# Altium PCB PCB1.PcbDoc
Units mm, origin at the board's own origin, x right, y up, seen from the top; angles counter-clockwise.
Board outline 144.53 x 25.27 mm, 2 copper layers (Top Layer, Bottom Layer), stack 1.571 mm thick; 104 components, 78 nets, 265 pads, 76 vias.
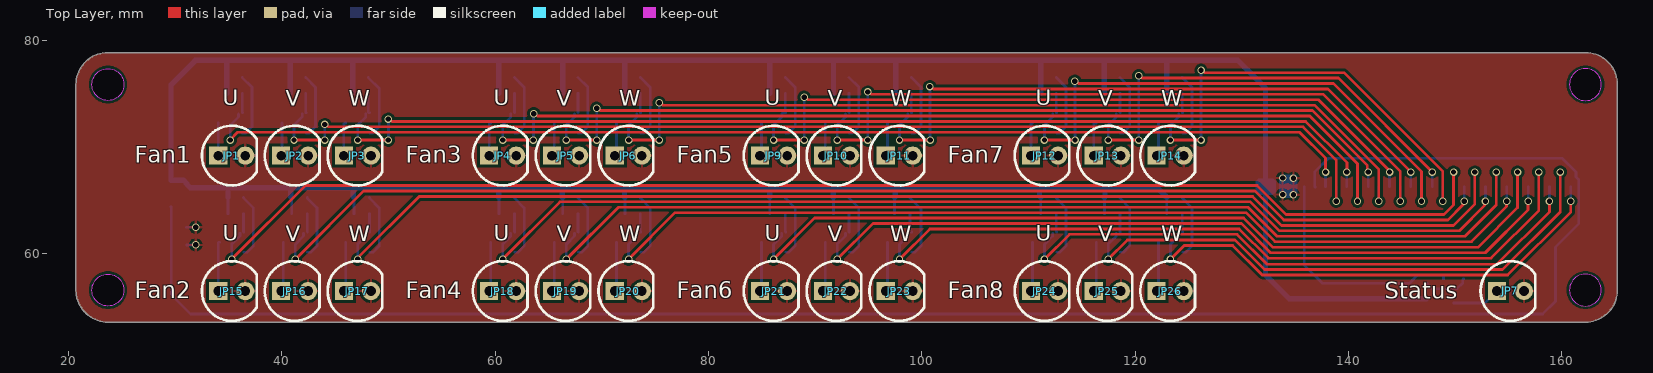
[diagram p0: Top Layer view]
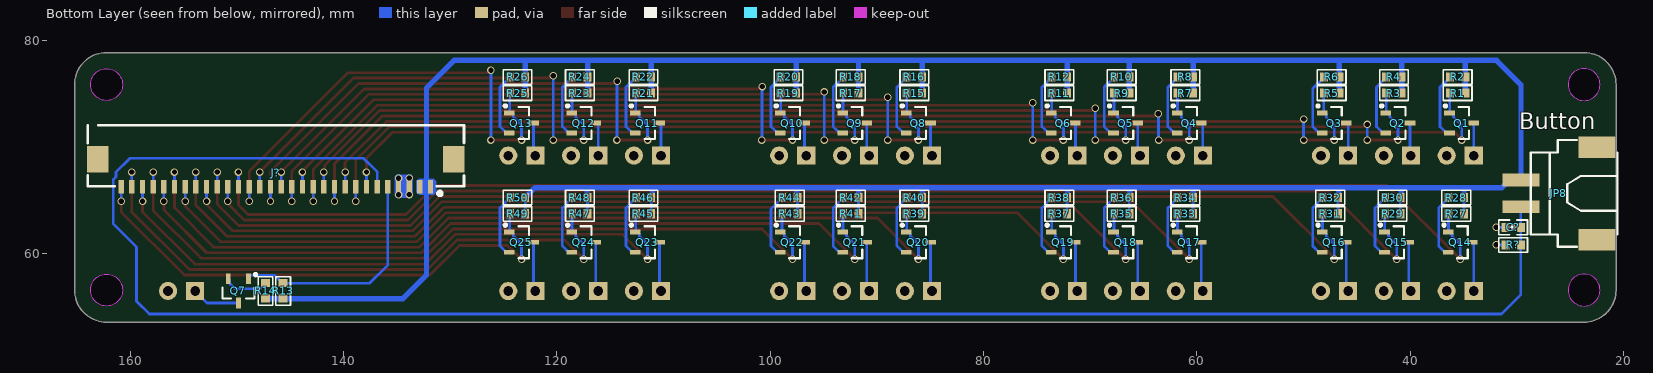
[diagram p1: Bottom Layer view, seen from below]
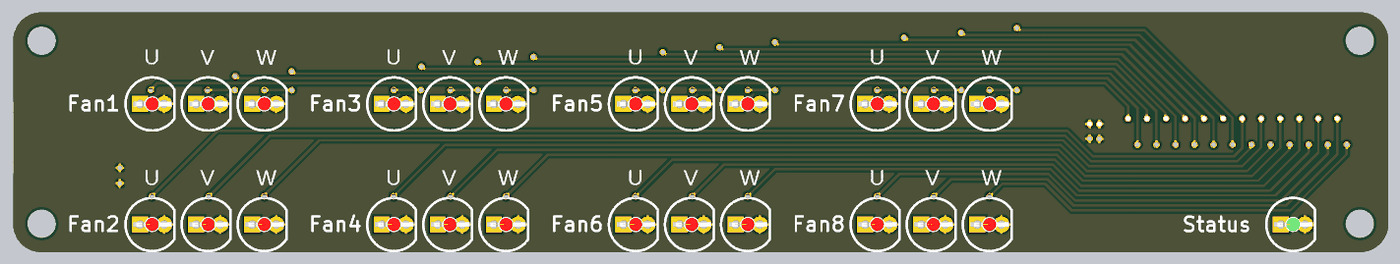
[diagram p2: 3D render of the assembled board from above, using the file's embedded part models]
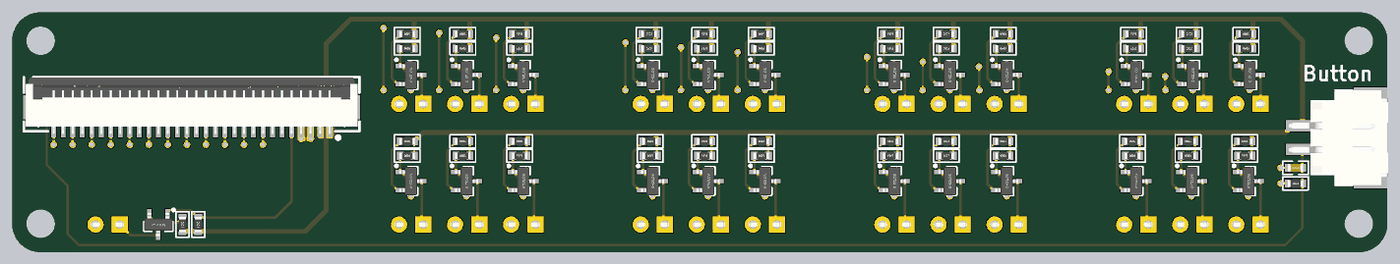
[diagram p3: 3D render of the assembled board from below, using the file's embedded part models]

## Layer stack, top to bottom
Top Solder: solder mask 0.0102, Solder Resist, Dk 3.5
Top Layer: signal copper 0.0356
Dielectric 1: dielectric 1.5, FR-4, Dk 4.8
Bottom Layer: signal copper 0.0356
Bottom Solder: solder mask 0.0102, Solder Resist, Dk 3.5

## Board outline
23.701,53.594 cw(c23.701,56.594) 20.701,56.594 20.701,75.867 cw(c23.701,75.867) 23.701,78.867 162.227,78.867 cw(c162.227,75.867) 165.227,75.867 165.227,56.594 cw(c162.227,56.594) 162.227,53.594
cut-out: 23.701,55.094 cw(c23.701,56.594) 22.201,56.594 cw(c23.701,56.594) 23.701,58.094 cw(c23.701,56.594) 25.201,56.594 cw(c23.701,56.594)
cut-out: 23.701,74.367 cw(c23.701,75.867) 22.201,75.867 cw(c23.701,75.867) 23.701,77.367 cw(c23.701,75.867) 25.201,75.867 cw(c23.701,75.867)
cut-out: 160.727,75.867 ccw(c162.227,75.867) 162.227,74.367 ccw(c162.227,75.867) 163.727,75.867 ccw(c162.227,75.867) 162.227,77.367 ccw(c162.227,75.867)
cut-out: 160.727,56.594 ccw(c162.227,56.594) 162.227,55.094 ccw(c162.227,56.594) 163.727,56.594 ccw(c162.227,56.594) 162.227,58.094 ccw(c162.227,56.594)

## Design rules (kind name [scope] priority, off if disabled: settings)
Clearance [All] p1: gap=0.254 ignorepadtopadclearanceinfootprint=FALSE except(0: Arc-Hole Track-Hole SMDPad-Hole THPad-Hole Via-Hole Fill-Hole Poly-Hole Region-Hole Text-Hole)
PolygonConnect [All] p1: connectstyle=Relief reliefconductorwidth=0.254 reliefentries=4 polygonreliefangle="90 Angle" airgapwidth=0.254
RoutingVias [All] p1: holewidth=0.711 width=1.27 viastyle="Through Hole" minholewidth=0.3 minwidth=0.4 maxholewidth=0.5 maxwidth=0.7
SolderMaskExpansion [All] p1: expansion=0.102 istentingtop=FALSE
Width [All] p1: maxlimit=2.54 minlimit=0.254 preferedwidth=0.254
30 further rules are at their usual default settings.

## Components (designator, comment, footprint, x,y, rotation, side; value= is the part's Value field where it differs from the comment)
C? "100nF/25V" C0603_L 30.353,62.484 r0 bottom
J? "Header 30X1" FPC1.0-2H-WS-30P 146.359,68.829 r0 bottom
JP1 "HDR-1X2" "LED 5MM-R" 35.312,69.209 r0 top
JP2 "HDR-1X2" "LED 5MM-R" 41.204,69.209 r0 top
JP3 "HDR-1X2" "LED 5MM-R" 47.095,69.209 r0 top
JP4 "HDR-1X2" "LED 5MM-R" 60.712,69.209 r0 top
JP5 "HDR-1X2" "LED 5MM-R" 66.604,69.209 r0 top
JP6 "HDR-1X2" "LED 5MM-R" 72.495,69.209 r0 top
JP7 "HDR-1X2" "LED 5MM-G" 155.194,56.515 r0 top
JP8 "HDR-1X2" XH2.54-WS-2P 24.638,65.659 r90 bottom
JP9 "HDR-1X2" "LED 5MM-R" 86.112,69.209 r0 top
JP10 "HDR-1X2" "LED 5MM-R" 92.004,69.209 r0 top
JP11 "HDR-1X2" "LED 5MM-R" 97.895,69.209 r0 top
JP12 "HDR-1X2" "LED 5MM-R" 111.512,69.209 r0 top
JP13 "HDR-1X2" "LED 5MM-R" 117.404,69.209 r0 top locked
JP14 "HDR-1X2" "LED 5MM-R" 123.295,69.209 r0 top
JP15 "HDR-1X2" "LED 5MM-R" 35.312,56.509 r0 top
JP16 "HDR-1X2" "LED 5MM-R" 41.204,56.509 r0 top
JP17 "HDR-1X2" "LED 5MM-R" 47.095,56.509 r0 top
JP18 "HDR-1X2" "LED 5MM-R" 60.712,56.509 r0 top
JP19 "HDR-1X2" "LED 5MM-R" 66.604,56.509 r0 top
JP20 "HDR-1X2" "LED 5MM-R" 72.495,56.509 r0 top
JP21 "HDR-1X2" "LED 5MM-R" 86.112,56.509 r0 top
JP22 "HDR-1X2" "LED 5MM-R" 92.004,56.509 r0 top
JP23 "HDR-1X2" "LED 5MM-R" 97.895,56.509 r0 top
JP24 "HDR-1X2" "LED 5MM-R" 111.512,56.509 r0 top
JP25 "HDR-1X2" "LED 5MM-R" 117.404,56.509 r0 top
JP26 "HDR-1X2" "LED 5MM-R" 123.295,56.509 r0 top
Q1 "AO3401" SOT23-3L 35.179,72.263 r270 bottom
Q2 "AO3401" SOT23-3L 41.148,72.263 r270 bottom
Q3 "AO3401" SOT23-3L 47.117,72.263 r270 bottom
Q4 "AO3401" SOT23-3L 60.706,72.263 r270 bottom
Q5 "AO3401" SOT23-3L 66.675,72.263 r270 bottom
Q6 "AO3401" SOT23-3L 72.517,72.263 r270 bottom
Q7 "AO3401" SOT23-3L 149.86,56.515 r0 bottom
Q8 "AO3401" SOT23-3L 86.106,72.263 r270 bottom
Q9 "AO3401" SOT23-3L 92.075,72.263 r270 bottom
Q10 "AO3401" SOT23-3L 97.917,72.263 r270 bottom
Q11 "AO3401" SOT23-3L 111.506,72.263 r270 bottom
Q12 "AO3401" SOT23-3L 117.475,72.263 r270 bottom
Q13 "AO3401" SOT23-3L 123.317,72.263 r270 bottom
Q14 "AO3401" SOT23-3L 35.306,61.087 r270 bottom
Q15 "AO3401" SOT23-3L 41.275,61.087 r270 bottom
Q16 "AO3401" SOT23-3L 47.117,61.087 r270 bottom
Q17 "AO3401" SOT23-3L 60.706,61.087 r270 bottom
Q18 "AO3401" SOT23-3L 66.675,61.087 r270 bottom
Q19 "AO3401" SOT23-3L 72.517,61.087 r270 bottom
Q20 "AO3401" SOT23-3L 86.106,61.087 r270 bottom
Q21 "AO3401" SOT23-3L 92.075,61.087 r270 bottom
Q22 "AO3401" SOT23-3L 97.917,61.087 r270 bottom
Q23 "AO3401" SOT23-3L 111.506,61.087 r270 bottom
Q24 "AO3401" SOT23-3L 117.475,61.087 r270 bottom
Q25 "AO3401" SOT23-3L 123.317,61.087 r270 bottom
R1 "10K 1%" R0603_L 35.56,75.057 r180 bottom
R2 "0R 1%" R0603_L 35.56,76.581 r180 bottom
R3 "10K 1%" R0603_L 41.529,75.057 r180 bottom
R4 "0R 1%" R0603_L 41.529,76.581 r180 bottom
R5 "10K 1%" R0603_L 47.371,75.057 r180 bottom
R6 "0R 1%" R0603_L 47.371,76.581 r180 bottom
R7 "10K 1%" R0603_L 61.087,75.057 r180 bottom
R8 "0R 1%" R0603_L 61.087,76.581 r180 bottom
R9 "10K 1%" R0603_L 67.056,75.057 r180 bottom
R10 "0R 1%" R0603_L 67.056,76.581 r180 bottom
R11 "10K 1%" R0603_L 72.898,75.057 r180 bottom
R12 "0R 1%" R0603_L 72.898,76.581 r180 bottom
R13 "10K 1%" R0603_L 145.669,56.515 r270 bottom
R14 "0R 1%" R0603_L 147.32,56.515 r270 bottom
R15 "10K 1%" R0603_L 86.487,75.057 r180 bottom
R16 "0R 1%" R0603_L 86.487,76.581 r180 bottom
R17 "10K 1%" R0603_L 92.456,75.057 r180 bottom
R18 "0R 1%" R0603_L 92.456,76.581 r180 bottom
R19 "10K 1%" R0603_L 98.298,75.057 r180 bottom
R20 "0R 1%" R0603_L 98.298,76.581 r180 bottom
R21 "10K 1%" R0603_L 111.887,75.057 r180 bottom
R22 "0R 1%" R0603_L 111.887,76.581 r180 bottom
R23 "10K 1%" R0603_L 117.856,75.057 r180 bottom
R24 "0R 1%" R0603_L 117.856,76.581 r180 bottom
R25 "10K 1%" R0603_L 123.698,75.057 r180 bottom
R26 "0R 1%" R0603_L 123.698,76.581 r180 bottom
R27 "10K 1%" R0603_L 35.687,63.754 r180 bottom
R28 "0R 1%" R0603_L 35.687,65.278 r180 bottom
R29 "10K 1%" R0603_L 41.656,63.754 r180 bottom
R30 "0R 1%" R0603_L 41.656,65.278 r180 bottom
R31 "10K 1%" R0603_L 47.498,63.754 r180 bottom
R32 "0R 1%" R0603_L 47.498,65.278 r180 bottom
R33 "10K 1%" R0603_L 61.087,63.754 r180 bottom
R34 "0R 1%" R0603_L 61.087,65.278 r180 bottom
R35 "10K 1%" R0603_L 67.056,63.754 r180 bottom
R36 "0R 1%" R0603_L 67.056,65.278 r180 bottom
R37 "10K 1%" R0603_L 72.898,63.754 r180 bottom
R38 "0R 1%" R0603_L 72.898,65.278 r180 bottom
R39 "10K 1%" R0603_L 86.487,63.754 r180 bottom
R40 "0R 1%" R0603_L 86.487,65.278 r180 bottom
R41 "10K 1%" R0603_L 92.456,63.754 r180 bottom
R42 "0R 1%" R0603_L 92.456,65.278 r180 bottom
R43 "10K 1%" R0603_L 98.171,63.754 r180 bottom
R44 "0R 1%" R0603_L 98.171,65.278 r180 bottom
R45 "10K 1%" R0603_L 111.887,63.754 r180 bottom
R46 "0R 1%" R0603_L 111.887,65.278 r180 bottom
R47 "10K 1%" R0603_L 117.856,63.754 r180 bottom
R48 "0R 1%" R0603_L 117.856,65.278 r180 bottom
R49 "10K 1%" R0603_L 123.698,63.754 r180 bottom
R50 "0R 1%" R0603_L 123.698,65.278 r180 bottom
R? "10K 1%" R0603_L 30.353,60.833 r180 bottom

## Footprints (in the part's own frame and the unit in brackets; to place one, negate y for a bottom-side part, rotate by r counter-clockwise, add the part's x,y. Pads: shape width x height; smd on the part's side, far side on the other; paste and mask are expansions set on the pad)
C0603_L [mm] "贴片MLCC电容"
  rect 0.75x0.85 smd: 1(-0.725,0) 2(0.725,0)
  silkscreen extent -1.35,-0.69 1.35,0.69, body extent -0.8,-0.4 0.8,0.4, height 0.8
FPC1.0-2H-WS-30P [mm] "翻盖FPC，脚距1mm，不含脚（长34.9mm，宽5.2mm，高1.96mm）"
  rect 2x2.5 smd: 0(-16.69,-0.04) 0(16.69,-0.04)
  rect 0.5x1.25 smd: 1(-14.5,2.535) 2(-13.5,2.535) 3(-12.5,2.535) 4(-11.5,2.535) 5(-10.5,2.535) 6(-9.5,2.535) 7(-8.5,2.535) 8(-7.5,2.535) 9(-6.5,2.535) 10(-5.5,2.535) 11(-4.5,2.535) 12(-3.5,2.535) 13(-2.5,2.535) 14(-1.5,2.535) 15(-0.5,2.535) 16(0.5,2.535) 17(1.5,2.535) 18(2.5,2.535) 19(3.5,2.535) 20(4.5,2.535) 21(5.5,2.535) 22(6.5,2.535) 23(7.5,2.535) 24(8.5,2.535) 25(9.5,2.535) 26(10.5,2.535) 27(11.5,2.535) 28(12.5,2.535) 29(13.5,2.535) 30(14.5,2.535)
  silkscreen extent -17.64,-3.21 17.63,3.27, body extent -17.45,-3.19 17.45,2.81, height 2
"LED 5MM-G" [mm] "绿色5mm直插LED"
  rect 1.7x1.7 hole 0.9: 1(-1.27,0)
  round 1.7 hole 0.9: 2(1.27,0)
  silkscreen extent -2.8,-2.8 2.33,2.8, body extent -2.85,-2.85 2.45,2.85, height 8.75
"LED 5MM-R" [mm] "红色5mm直插LED"
  rect 1.7x1.7 hole 0.9: 1(-1.27,0)
  round 1.7 hole 0.9: 2(1.27,0)
  silkscreen extent -2.8,-2.8 2.33,2.8, body extent -2.85,-2.85 2.45,2.85, height 8.75
R0603_L [mm] "1/10W贴片电阻"
  rect 0.75x0.85 smd: 1(-0.725,0) 2(0.725,0)
  silkscreen extent -1.35,-0.69 1.35,0.69, body extent -0.8,-0.4 0.8,0.4, height 0.4
SOT23-3L [mm] "3x1.3x1mm(长宽高)"
  rect 0.45x1 smd: 1(-0.95,-1.143) 2(0.95,-1.143) 3(0,1.125)
  silkscreen extent -1.72,-1.65 1.5,0.7, body extent -1.5,-1.2 1.5,1.2, height 1.05
XH2.54-WS-2P [mm] "长：10mm，宽：8mm，高：6.1mm"
  rect 2x3.5 smd: 0(-4.327,-2.15) 0(4.327,-2.15)
  rect 1.2x3.5 smd: 1(-1.25,4.981) 2(1.25,4.981)
  silkscreen extent -5,-4.06 5,4.06, body extent -5,-4 5,6.42, height 6.05

## Part data
C?: library part C, "无极性贴片电容", BOM名称=无极性贴片电容, 学习资源=www.ooocke.com, 材质=X7R, 版权归属=源创客
JP1 JP2 JP3 JP4 JP5 JP6 JP7 JP8 JP9 JP10 JP11 JP12 JP13 JP14 JP15 JP16 JP17 JP18 JP19 JP20 JP21 JP22 JP23 JP24 JP25 JP26: library part "Header 2", "2P接插件", BOM名称=2P接插件, 学习资源=www.ooocke.com, 版权归属=源创客
Q1 Q2 Q3 Q4 Q5 Q6 Q7 Q8 Q9 Q10 Q11 Q12 Q13 Q14 Q15 Q16 Q17 Q18 Q19 Q20 Q21 Q22 Q23 Q24 Q25: "P沟道 30V/4.2A", BOM名称=场效应管, 学习资源=www.ooocke.com, 描述="P沟道 30V/4.2A", 版权归属=源创客
R1 R2 R3 R4 R5 R6 R7 R8 R9 R10 R11 R12 R13 R14 R15 R16 R17 R18 R19 R20 R21 R22 R23 R24 R25 R26 R27 R28 R29 R30 R31 R32 R33 R34 R35 R36 R37 R38 R39 R40 R41 R42 R43 R44 R45 R46 R47 R48 R49 R50 R?: library part R, "贴片电阻", BOM名称=贴片电阻, 学习资源=www.ooocke.com, 版权归属=源创客

## Via types
v1: diameter 0.7, hole 0.5, Top Layer to Bottom Layer, 76 vias

## Nets (pads, with @x,y where several pads share a name; then routed paths per layer and width w, separated by ;. In a path a pad name is that pad's centre, name@x,y a point inside that pad or via, vN(x,y) a via of type N, cw(c..) or ccw(c..) an arc to the next point about the centre after c; other vN are vias at no path point)
Button: C?.1 J?.6 JP8.1 R?.2 | length 179.4
  Bottom Layer w0.254: JP8.1 29.628,64.4 C?.1 R?.2 29.628,56.173 31.445,54.356 158.217,54.356 159.41,55.55 159.41,60.63 161.586,62.806 161.586,66.981 161.341,67.226 161.341,67.666 160.045,68.961 138.124,68.961 136.859,67.696 J?.6 J?.6@136.9,66.253
GND: C?.2 J?.3 J?.4 JP1.2 JP2.2 JP3.2 JP4.2 JP5.2 JP6.2 JP7.2 JP9.2 JP10.2 JP11.2 JP12.2 JP13.2 JP14.2 JP15.2 JP16.2 JP17.2 JP18.2 JP19.2 JP20.2 JP21.2 JP22.2 JP23.2 JP24.2 JP25.2 JP26.2 R?.1 | length 2.2
  Bottom Layer w0.254: R?.1 v1(31.926,60.833) ; C?.2 v1(31.926,62.484) ; 134.493,66.497 J?.4@134.874,66.878
  other v1: 134.849,65.532 133.833,65.557 134.849,67.081 133.833,67.107
NetJP1_1: JP1.1 Q1.3 | length 3.1
  Bottom Layer w0.254: JP1.1@34.054,69.221 JP1.1 34.042,72.251 Q1.3
NetJP2_1: JP2.1 Q2.3 | length 3.1
  Bottom Layer w0.254: JP2.1 40.023,69.298 Q2.3
NetJP3_1: JP3.1 Q3.3 | length 3.4
  Bottom Layer w0.254: JP3.1@45.992,69.376 JP3.1 45.825,72.165 45.923,72.263 Q3.3
NetJP4_1: JP4.1 Q4.3 | length 3.3
  Bottom Layer w0.254: JP4.1@59.581,69.348 JP4.1 59.442,72.165 59.54,72.263 Q4.3
NetJP5_1: JP5.1 Q5.3 | length 3.1
  Bottom Layer w0.254: JP5.1 65.55,69.425 Q5.3
NetJP6_1: JP6.1 Q6.3 | length 3.1
  Bottom Layer w0.254: JP6.1 71.392,69.376 Q6.3
NetJP7_1: JP7.1 Q7.3 | length 4.5
  Bottom Layer w0.254: Q7.3 152.799,55.39 JP7.1
NetJP9_1: JP9.1 Q8.3 | length 3.1
  Bottom Layer w0.254: JP9.1 84.981,69.348 Q8.3
NetJP10_1: JP10.1 Q9.3 | length 3.1
  Bottom Layer w0.254: JP10.1 90.95,69.425 Q9.3
NetJP11_1: JP11.1 Q10.3 | length 3.1
  Bottom Layer w0.254: JP11.1 96.792,69.376 Q10.3
NetJP12_1: JP12.1 Q11.3 | length 3.3
  Bottom Layer w0.254: JP12.1@110.381,69.348 JP12.1 110.242,72.165 110.34,72.263 Q11.3
NetJP13_1: JP13.1 Q12.3 | length 3.5
  Bottom Layer w0.254: JP13.1@116.35,69.425 JP13.1 116.134,72.165 116.232,72.263 Q12.3
NetJP14_1: JP14.1 Q13.3 | length 3.1
  Bottom Layer w0.254: JP14.1 122.192,69.376 Q13.3
NetJP15_1: JP15.1 Q14.3 | length 4.7
  Bottom Layer w0.254: JP15.1 34.042,60.989 34.14,61.087 Q14.3
NetJP16_1: JP16.1 Q15.3 | length 4.7
  Bottom Layer w0.254: JP16.1 40.15,56.725 Q15.3
NetJP17_1: JP17.1 Q16.3 | length 4.6
  Bottom Layer w0.254: JP17.1 45.992,56.676 Q16.3
NetJP18_1: JP18.1 Q17.3 | length 4.6
  Bottom Layer w0.254: JP18.1 59.581,56.648 Q17.3
NetJP19_1: JP19.1 Q18.3 | length 4.7
  Bottom Layer w0.254: JP19.1 65.55,56.725 Q18.3
NetJP20_1: JP20.1 Q19.3 | length 4.6
  Bottom Layer w0.254: JP20.1 71.392,56.676 Q19.3
NetJP21_1: JP21.1 Q20.3 | length 4.6
  Bottom Layer w0.254: JP21.1 84.981,56.648 Q20.3
NetJP22_1: JP22.1 Q21.3 | length 4.7
  Bottom Layer w0.254: JP22.1 90.95,56.725 Q21.3
NetJP23_1: JP23.1 Q22.3 | length 4.6
  Bottom Layer w0.254: JP23.1 96.792,56.676 Q22.3
NetJP24_1: JP24.1 Q23.3 | length 4.6
  Bottom Layer w0.254: JP24.1 110.381,56.648 Q23.3
NetJP25_1: JP25.1 Q24.3 | length 4.7
  Bottom Layer w0.254: JP25.1 116.35,56.725 Q24.3
NetJP26_1: JP26.1 Q25.3 | length 4.6
  Bottom Layer w0.254: JP26.1 122.192,56.676 Q25.3
NetQ1_2: Q1.2 R2.1 | length 6.1
  Bottom Layer w0.254: R2.1@36.285,76.531 37.203,75.613 37.203,71.919 36.597,71.313 Q1.2
NetQ2_2: Q2.2 R4.1 | length 6.1
  Bottom Layer w0.254: R4.1@42.254,76.531 43.172,75.613 43.172,71.919 42.566,71.313 Q2.2
NetQ3_2: Q3.2 R6.1 | length 6.2
  Bottom Layer w0.254: R6.1@48.096,76.531 49.141,75.486 49.141,71.919 48.535,71.313 Q3.2
NetQ4_2: Q4.2 R8.1 | length 6.1
  Bottom Layer w0.254: R8.1@61.812,76.531 62.73,75.613 62.73,71.919 62.124,71.313 Q4.2
NetQ5_2: Q5.2 R10.1 | length 6.1
  Bottom Layer w0.254: R10.1@67.781,76.531 68.699,75.613 68.699,71.919 68.093,71.313 Q5.2
NetQ6_2: Q6.2 R12.1 | length 6.1
  Bottom Layer w0.254: R12.1@73.623,76.531 74.541,75.613 74.541,71.919 73.935,71.313 Q6.2
NetQ7_2: Q7.2 R14.1 | length 4.3
  Bottom Layer w0.254: R14.1 147.37,57.24 147.618,56.992 147.618,56.942 147.828,56.732 150.204,56.732 150.712,57.24 150.712,57.56 Q7.2
NetQ8_2: Q8.2 R16.1 | length 6.1
  Bottom Layer w0.254: R16.1@87.212,76.531 88.13,75.613 88.13,71.919 87.524,71.313 Q8.2
NetQ9_2: Q9.2 R18.1 | length 6.1
  Bottom Layer w0.254: R18.1@93.181,76.531 94.099,75.613 94.099,71.919 93.493,71.313 Q9.2
NetQ10_2: Q10.2 R20.1 | length 6.1
  Bottom Layer w0.254: R20.1@99.023,76.531 99.941,75.613 99.941,71.919 99.335,71.313 Q10.2
NetQ11_2: Q11.2 R22.1 | length 6.1
  Bottom Layer w0.254: R22.1@112.612,76.531 113.53,75.613 113.53,71.919 112.924,71.313 Q11.2
NetQ12_2: Q12.2 R24.1 | length 6.1
  Bottom Layer w0.254: R24.1@118.581,76.531 119.499,75.613 119.499,71.919 118.893,71.313 Q12.2
NetQ13_2: Q13.2 R26.1 | length 6.1
  Bottom Layer w0.254: R26.1@124.423,76.531 125.341,75.613 125.341,71.919 124.735,71.313 Q13.2
NetQ14_2: Q14.2 R28.1 | length 6
  Bottom Layer w0.254: R28.1 36.412,65.228 37.33,64.31 37.33,60.743 36.724,60.137 Q14.2
NetQ15_2: Q15.2 R30.1 | length 6
  Bottom Layer w0.254: R30.1 42.381,65.228 43.299,64.31 43.299,60.743 42.693,60.137 Q15.2
NetQ16_2: Q16.2 R32.1 | length 6
  Bottom Layer w0.254: R32.1 48.223,65.228 49.141,64.31 49.141,60.743 48.535,60.137 Q16.2
NetQ17_2: Q17.2 R34.1 | length 6
  Bottom Layer w0.254: R34.1 61.812,65.228 62.73,64.31 62.73,60.743 62.124,60.137 Q17.2
NetQ18_2: Q18.2 R36.1 | length 6
  Bottom Layer w0.254: R36.1 67.781,65.228 68.699,64.31 68.699,60.743 68.093,60.137 Q18.2
NetQ19_2: Q19.2 R38.1 | length 6
  Bottom Layer w0.254: R38.1 73.623,65.228 74.541,64.31 74.541,60.743 73.935,60.137 Q19.2
NetQ20_2: Q20.2 R40.1 | length 6
  Bottom Layer w0.254: R40.1 87.212,65.228 88.13,64.31 88.13,60.743 87.524,60.137 Q20.2
NetQ21_2: Q21.2 R42.1 | length 6
  Bottom Layer w0.254: R42.1 93.181,65.228 94.099,64.31 94.099,60.743 93.493,60.137 Q21.2
NetQ22_2: Q22.2 R44.1 | length 6.1
  Bottom Layer w0.254: R44.1 98.896,65.228 99.941,64.183 99.941,60.743 99.335,60.137 Q22.2
NetQ23_2: Q23.2 R46.1 | length 6
  Bottom Layer w0.254: R46.1 112.612,65.228 113.53,64.31 113.53,60.743 112.924,60.137 Q23.2
NetQ24_2: Q24.2 R48.1 | length 6
  Bottom Layer w0.254: R48.1 118.581,65.228 119.499,64.31 119.499,60.743 118.893,60.137 Q24.2
NetQ25_2: Q25.2 R50.1 | length 6
  Bottom Layer w0.254: R50.1 124.423,65.228 125.341,64.31 125.341,60.743 124.735,60.137 Q25.2
Part1_LED_U: J?.7 Q1.1 R1.1 | length 111.3
  Top Layer w0.254: v1(35.179,70.663) 35.179,70.721 35.851,71.394 135.438,71.394 137.863,68.969 v1(137.863,67.666)
  Bottom Layer w0.254: v1(35.179,70.663) 35.179,72.07 35.949,72.84 Q1.1@35.949,73.115 ; R1.1 36.285,73.25 Q1.1 ; J?.7@137.861,66.296 137.861,67.664 v1(137.863,67.666)
Part1_LED_V: J?.8 Q2.1 R3.1 | length 110.5
  Top Layer w0.254: v1(41.148,70.663) v1(44.018,70.663) ; v1(44.044,72.125) 44.164,72.125 v1@44.25,72.039 ; v1@44.159,72.009 44.189,72.039 v1@44.25,72.039 ; v1(138.855,64.922) 138.855,68.79 135.743,71.902 44.387,71.902 v1@44.25,72.039
  Bottom Layer w0.254: v1(41.148,70.663) 41.148,72.07 41.918,72.84 Q2.1@41.918,73.115 ; R3.1 42.254,73.25 Q2.1 ; v1(44.018,70.663) 44.044,70.688 v1(44.044,72.125) ; v1(138.855,64.922) 138.857,64.924 J?.8@138.857,66.292
Part1_LED_W: J?.9 Q3.1 R5.1 | length 103.4
  Top Layer w0.254: v1(47.117,70.663) v1(49.987,70.663) ; v1(49.987,72.633) 50.108,72.633 50.331,72.41 135.997,72.41 139.863,68.544 v1(139.863,67.666)
  Bottom Layer w0.254: v1(47.117,70.663) 47.117,72.07 47.887,72.84 Q3.1@47.887,73.115 ; R5.1 48.096,73.311 48.194,73.213 Q3.1 ; v1(49.987,70.663) 50,70.675 50,72.62 v1(49.987,72.633) ; J?.9@139.861,66.296 139.861,67.664 v1(139.863,67.666)
Part2_LED_U: J?.10 Q4.1 R7.1 | length 94.1
  Top Layer w0.254: v1(60.706,70.663) v1(63.576,70.663) ; v1(63.627,73.141) 63.748,73.141 63.971,72.918 136.378,72.918 140.855,68.441 v1(140.855,64.922)
  Bottom Layer w0.254: v1(60.706,70.663) 60.706,72.07 61.476,72.84 Q4.1@61.476,73.115 ; R7.1 61.812,73.25 Q4.1 ; v1(63.576,70.663) 63.602,70.688 63.602,73.115 v1(63.627,73.141) ; v1(140.855,64.922) 140.857,64.924 J?.10@140.857,66.292
Part2_LED_V: J?.11 Q5.1 R9.1 | length 86.9
  Top Layer w0.254: v1(66.675,70.663) v1(69.545,70.663) ; v1(69.52,73.649) 69.64,73.649 69.863,73.426 136.625,73.426 141.777,68.273 141.777,67.751 v1(141.863,67.666)
  Bottom Layer w0.254: v1(66.675,70.663) 66.675,72.07 67.445,72.84 Q5.1@67.445,73.115 ; Q5.1@67.781,73.25 R9.1 ; v1(69.52,73.649) 69.52,70.688 v1(69.545,70.663) ; J?.11@141.861,66.296 141.861,67.664 v1(141.863,67.666)
Part2_LED_W: J?.12 Q6.1 R11.1 | length 85.4
  Top Layer w0.254: v1(72.517,70.663) v1(75.387,70.663) ; v1(75.387,74.157) 75.508,74.157 75.731,73.934 136.835,73.934 142.855,67.914 v1(142.855,64.922)
  Bottom Layer w0.254: v1(72.517,70.663) 72.517,72.07 73.287,72.84 Q6.1@73.287,73.115 ; R11.1 73.623,73.25 Q6.1 ; v1(75.387,70.663) v1(75.387,74.157) ; v1(142.855,64.922) 142.857,64.924 J?.12@142.857,66.292
Part3_LED_U: J?.13 Q8.1 R15.1 | length 71.1
  Top Layer w0.254: v1(86.106,70.663) v1(88.976,70.663) ; v1(88.976,74.665) 89.097,74.665 89.32,74.442 137.207,74.442 143.863,67.786 v1(143.863,67.666)
  Bottom Layer w0.254: v1(86.106,70.663) 86.106,72.07 86.876,72.84 86.876,73.115 86.974,73.213 Q8.1 87.212,73.25 R15.1 ; v1(88.976,70.663) v1(88.976,74.665) ; J?.13@143.861,66.296 143.861,67.664 v1(143.863,67.666)
Part3_LED_V: J?.14 Q9.1 R17.1 | length 69.2
  Top Layer w0.254: v1(92.075,70.663) v1(94.945,70.663) ; v1(94.945,75.173) 95.066,75.173 95.289,74.95 137.648,74.95 144.855,67.743 v1(144.855,64.922)
  Bottom Layer w0.254: v1(92.075,70.663) 92.075,72.07 92.845,72.84 Q9.1@92.845,73.115 ; R17.1 93.181,73.25 Q9.1 ; v1(94.945,70.663) v1(94.945,75.173) ; v1(144.855,64.922) 144.857,64.924 J?.14@144.857,66.292
Part3_LED_W: J?.15 Q10.1 R19.1 | length 62.3
  Top Layer w0.254: v1(97.917,70.663) v1(100.787,70.663) ; v1(100.762,75.681) 100.882,75.681 101.105,75.458 138.071,75.458 145.761,67.767 v1@145.847,67.767
  Bottom Layer w0.254: v1(97.917,70.663) 97.917,72.07 98.687,72.84 Q10.1@98.687,73.115 ; R19.1 99.023,73.25 Q10.1 ; v1(100.762,75.681) 100.774,75.668 100.774,70.675 v1(100.787,70.663) ; J?.15@145.861,66.296 145.861,67.664 v1(145.863,67.666)
Part4_LED_U: J?.16 Q11.1 R21.1 | length 53.2
  Top Layer w0.254: v1(111.506,70.663) v1(114.376,70.663) ; v1(114.351,76.189) 114.471,76.189 114.694,75.966 138.596,75.966 146.855,67.707 v1(146.855,64.922)
  Bottom Layer w0.254: v1(111.506,70.663) 111.506,72.07 112.276,72.84 Q11.1@112.276,73.115 ; R21.1 112.612,73.25 Q11.1 ; v1(114.351,76.189) 114.364,76.176 114.364,70.675 v1(114.376,70.663) ; v1(146.855,64.922) 146.857,64.924 J?.16@146.857,66.292
Part4_LED_V: J?.17 Q12.1 R23.1 | length 46.2
  Top Layer w0.254: v1(117.475,70.663) v1(120.345,70.663) ; v1(120.345,76.697) 120.466,76.697 120.689,76.474 139.055,76.474 v1(147.863,67.666)
  Bottom Layer w0.254: v1(117.475,70.663) 117.475,72.07 118.245,72.84 Q12.1@118.245,73.115 ; R23.1 118.581,73.25 Q12.1 ; v1(120.345,70.663) v1(120.345,76.697) ; J?.17@147.861,66.296 147.861,67.664 v1(147.863,67.666)
Part4_LED_W: J?.18 Q13.1 R25.1 | length 44.8
  Top Layer w0.254: v1(123.317,70.663) v1(126.187,70.663) ; v1(126.187,77.205) 126.308,77.205 126.531,76.982 139.58,76.982 148.855,67.707 v1(148.855,64.922)
  Bottom Layer w0.254: v1(123.317,70.663) 123.317,72.07 124.087,72.84 Q13.1@124.087,73.115 ; R25.1 124.423,73.25 Q13.1 ; v1(126.187,70.663) v1(126.187,77.205) ; v1(148.855,64.922) 148.857,64.924 J?.18@148.857,66.292
Part5_LED_U: J?.19 Q14.1 R27.1 | length 127.9
  Top Layer w0.254: v1(35.306,59.487) 42.215,66.396 131.445,66.396 134.163,63.678 148.971,63.678 149.863,64.57 v1(149.863,67.666)
  Bottom Layer w0.254: v1(35.306,59.487) 35.306,60.894 36.076,61.664 Q14.1@36.076,61.939 ; R27.1 36.412,62.074 Q14.1 ; J?.19@149.861,66.296 149.861,67.664 v1(149.863,67.666)
Part5_LED_V: J?.20 Q15.1 R29.1 | length 120.1
  Top Layer w0.254: v1(41.275,59.487) 47.676,65.888 131.235,65.888 133.952,63.17 149.327,63.17 150.77,64.613 150.77,64.837 v1(150.855,64.922)
  Bottom Layer w0.254: v1(41.275,59.487) 41.275,60.894 42.045,61.664 Q15.1@42.045,61.939 ; R29.1 42.381,62.074 Q15.1 ; v1(150.855,64.922) 150.857,64.924 J?.20@150.857,66.292
Part5_LED_W: J?.21 Q16.1 R31.1 | length 118.1
  Top Layer w0.254: v1(47.117,59.487) 47.117,59.607 52.889,65.38 131.024,65.38 133.742,62.662 149.86,62.662 151.863,64.665 v1(151.863,67.666)
  Bottom Layer w0.254: v1(47.117,59.487) 47.117,60.894 47.887,61.664 Q16.1@47.887,61.939 ; R31.1 48.223,62.074 Q16.1 ; J?.21@151.861,66.296 151.861,67.664 v1(151.863,67.666)
Part6_LED_U: J?.22 Q17.1 R33.1 | length 102.7
  Top Layer w0.254: v1(60.706,59.487) 66.091,64.872 130.814,64.872 133.532,62.154 150.393,62.154 152.77,64.53 152.77,64.837 v1(152.855,64.922)
  Bottom Layer w0.254: v1(60.706,59.487) 60.706,60.894 61.476,61.664 Q17.1@61.476,61.939 ; R33.1 61.812,62.074 Q17.1 ; v1(152.855,64.922) 152.857,64.924 J?.22@152.857,66.292
Part6_LED_V: J?.23 Q18.1 R35.1 | length 100.5
  Top Layer w0.254: v1(66.675,59.487) 71.552,64.364 130.603,64.364 133.321,61.646 150.952,61.646 153.863,64.556 v1(153.863,67.666)
  Bottom Layer w0.254: v1(66.675,59.487) 66.675,60.894 67.445,61.664 Q18.1@67.445,61.939 ; R35.1 67.781,62.074 Q18.1 ; J?.23@153.861,66.296 153.861,67.664 v1(153.863,67.666)
Part6_LED_W: J?.24 Q19.1 R37.1 | length 93
  Top Layer w0.254: v1(72.517,59.487) 76.886,63.856 130.393,63.856 133.111,61.138 151.536,61.138 154.825,64.427 154.825,64.892 v1(154.855,64.922)
  Bottom Layer w0.254: v1(72.517,59.487) 72.517,60.894 73.287,61.664 Q19.1@73.287,61.939 ; R37.1 73.623,62.074 Q19.1 ; v1(154.855,64.922) 154.857,64.924 J?.24@154.857,66.292
Part7_LED_U: J?.25 Q20.1 R39.1 | length 83.3
  Top Layer w0.254: v1(86.106,59.487) 89.967,63.348 130.182,63.348 132.926,60.604 152.146,60.604 155.863,64.321 v1(155.863,67.666)
  Bottom Layer w0.254: v1(86.106,59.487) 86.106,60.894 86.876,61.664 Q20.1@86.876,61.939 ; R39.1 87.212,62.074 Q20.1 ; J?.25@155.861,66.296 155.861,67.664 v1(155.863,67.666)
Part7_LED_V: J?.26 Q21.1 R41.1 | length 75.6
  Top Layer w0.254: v1(92.075,59.487) 95.428,62.84 129.972,62.84 132.715,60.096 152.832,60.096 156.841,64.106 156.841,64.908 v1(156.855,64.922)
  Bottom Layer w0.254: v1(92.075,59.487) 92.075,60.894 92.845,61.664 Q21.1@92.845,61.939 ; R41.1 93.181,62.074 Q21.1 ; v1(156.855,64.922) 156.857,64.924 J?.26@156.857,66.292
Part7_LED_W: J?.27 Q22.1 R43.1 | length 73.7
  Top Layer w0.254: v1(97.917,59.487) 100.762,62.332 129.762,62.332 132.505,59.588 153.391,59.588 157.863,64.061 v1(157.863,67.666)
  Bottom Layer w0.254: v1(97.917,59.487) 97.917,60.894 98.687,61.664 Q22.1@98.687,61.939 ; R43.1 98.896,62.135 98.994,62.037 Q22.1 ; J?.27@157.861,66.296 157.861,67.664 v1(157.863,67.666)
Part8_LED_U: J?.28 Q23.1 R45.1 | length 58.4
  Top Layer w0.254: v1(111.506,59.487) 113.843,61.824 129.551,61.824 132.345,59.03 153.949,59.03 158.855,63.935 v1(158.855,64.922)
  Bottom Layer w0.254: v1(111.506,59.487) 111.506,60.894 112.276,61.664 Q23.1@112.276,61.939 ; R45.1 112.612,62.074 Q23.1 ; v1(158.855,64.922) 158.857,64.924 J?.28@158.857,66.292
Part8_LED_V: J?.29 Q24.1 R47.1 | length 56.1
  Top Layer w0.254: v1(117.475,59.487) 119.278,61.29 129.366,61.29 132.135,58.522 154.457,58.522 159.863,63.927 v1(159.863,67.666)
  Bottom Layer w0.254: v1(117.475,59.487) 117.475,60.894 118.245,61.664 Q24.1@118.245,61.939 ; R47.1 118.581,62.074 Q24.1 ; J?.29@159.861,66.296 159.861,67.664 v1(159.863,67.666)
Part8_LED_W: J?.30 Q25.1 R49.1 | length 48.5
  Top Layer w0.254: v1(123.317,59.487) 124.612,60.782 129.156,60.782 131.924,58.014 154.94,58.014 160.855,63.929 v1(160.855,64.922)
  Bottom Layer w0.254: v1(123.317,59.487) 123.317,60.894 124.087,61.664 Q25.1@124.087,61.939 ; R49.1 124.423,62.074 Q25.1 ; v1(160.855,64.922) 160.857,64.924 J?.30@160.857,66.292
Status: J?.5 Q7.1 R13.1 | length 21.7
  Bottom Layer w0.254: J?.5 135.859,58.959 137.578,57.24 R13.1 145.719,57.24 146.475,57.996 148.812,57.996 148.91,57.898 Q7.1
VCC3V3: J?.1 J?.2 JP8.2 R1.2 R2.2 R3.2 R4.2 R5.2 R6.2 R7.2 R8.2 R9.2 R10.2 R11.2 R12.2 R13.2 R14.2 R15.2 R16.2 R17.2 R18.2 R19.2 R20.2 R21.2 R22.2 R23.2 R24.2 R25.2 R26.2 R27.2 R28.2 R29.2 R30.2 R31.2 R32.2 R33.2 R34.2 R35.2 R36.2 R37.2 R38.2 R39.2 R40.2 R41.2 R42.2 R43.2 R44.2 R45.2 R46.2 R47.2 R48.2 R49.2 R50.2 | length 307.3
  Bottom Layer w0.254: R27.2 R28.2 ; R29.2 R30.2 ; R31.2 R32.2 ; R33.2 R34.2 ; R35.2 R36.2 ; R37.2 R38.2 ; R39.2 R40.2 ; R41.2 R42.2 ; R43.2 R44.2 ; R45.2 R46.2 ; R47.2 R48.2 ; R49.2 R50.2
  Bottom Layer w0.508: R1.2 R2.2 34.835,78.093 34.798,78.13 ; 34.881,66.211 34.957,66.135 34.957,65.283 R28.2 ; R3.2 R4.2 40.804,78.117 40.818,78.13 ; R30.2 40.858,65.351 40.858,66.066 40.713,66.211 ; R5.2 R6.2 46.646,78.093 46.609,78.13 ; R32.2 46.701,65.35 46.701,66.211 ; R34.2 60.362,66.211 ; R7.2 R8.2 60.362,78.091 60.401,78.13 ; R36.2 66.294,65.315 66.294,66.211 ; R9.2 R10.2 66.331,78.04 66.421,78.13 ; R38.2 72.136,65.315 72.136,66.211 ; R11.2 R12.2 72.173,78.117 72.187,78.13 ; R40.2 85.762,66.211 ; R15.2 R16.2 85.762,78.066 85.827,78.13 ; R42.2 91.694,65.315 91.694,66.211 ; R17.2 R18.2 91.731,77.964 91.897,78.13 ; R44.2 97.536,65.368 97.536,66.211 ; R19.2 R20.2 97.573,78.068 97.511,78.13 ; R46.2 111.041,65.399 111.041,66.168 110.998,66.211 ; R21.2 R22.2 111.162,78.066 111.227,78.13 ; R48.2 117.186,65.333 117.186,66.211 ; R23.2 117.131,78.13 ; R50.2 122.973,65.328 122.852,65.449 122.802,65.449 122.04,66.211 117.186,66.211 ; R25.2 R26.2 122.973,77.992 122.834,78.13 ; R14.2 R13.2 134.456,55.79 132.232,58.014 132.232,75.54 129.642,78.13 122.834,78.13 ; 34.798,78.13 40.818,78.13 ; 34.798,78.13 31.902,78.13 29.619,75.847 JP8.2 30.769,66.909 31.115,66.563 31.115,66.509 31.413,66.211 40.713,66.211 ; 40.713,66.211 46.701,66.211 ; 40.818,78.13 46.609,78.13 ; 46.609,78.13 60.401,78.13 ; 46.701,66.211 60.362,66.211 ; 60.362,66.211 66.294,66.211 ; 60.401,78.13 66.421,78.13 ; 66.294,66.211 72.136,66.211 ; 66.421,78.13 72.187,78.13 ; 72.136,66.211 91.694,66.211 ; 72.187,78.13 85.827,78.13 ; 85.827,78.13 91.897,78.13 ; 91.694,66.211 97.536,66.211 ; 91.897,78.13 97.511,78.13 ; 97.511,78.13 111.227,78.13 ; 97.536,66.211 110.998,66.211 ; 110.998,66.211 117.186,66.211 ; 111.227,78.13 117.131,78.13 ; 117.131,78.13 122.834,78.13
pads on no net: J?.0 JP8.0

## Polygon pours and split planes (outlines as drawn)
GND on Top Layer "GND_L01_P001" (solid, pour order 1): 23.701,53.594 cw(c23.701,56.594) 20.701,56.594 20.701,75.867 cw(c23.701,75.867) 23.701,78.867 162.227,78.867 cw(c162.227,75.867) 165.227,75.867 165.227,56.594 cw(c162.227,56.594) 162.227,53.594

## Other copper
Bottom Layer:
  region net GND: 133.655,67.412 133.502,67.259 133.502,65.43 133.655,65.278 135.052,65.278 135.204,65.43 135.204,67.259 135.052,67.412
  region net VCC3V3: 131.572,67.056 131.318,66.802 131.318,65.786 131.572,65.532 132.918,65.532 133.172,65.786 133.172,66.827 132.944,67.056

## Silkscreen, mask and mechanical layers (free items; w line width, h text height)
Top Overlay:
  text "U" at 34.479,73.389 h2.54
  text "U" at 59.879,73.389 h2.54
  text "U" at 85.279,73.389 h2.54
  text "U" at 110.679,73.389 h2.54
  text "V" at 40.373,73.363 h2.54
  text "W" at 46.262,73.363 h2.54
  text "V" at 65.773,73.363 h2.54
  text "W" at 71.662,73.363 h2.54
  text "V" at 91.173,73.363 h2.54
  text "W" at 97.062,73.363 h2.54
  text "V" at 116.573,73.363 h2.54
  text "W" at 122.462,73.363 h2.54
  text "Fan1" at 26.238,68.529 h1.52
  text "Fan3" at 51.638,68.529 h1.52
  text "Fan5" at 77.038,68.529 h1.52
  text "Fan7" at 102.438,68.529 h1.52
  text "U" at 34.479,60.689 h2.54
  text "U" at 59.879,60.689 h2.54
  text "U" at 85.279,60.689 h2.54
  text "U" at 110.679,60.689 h2.54
  text "V" at 40.373,60.663 h2.54
  text "W" at 46.262,60.663 h2.54
  text "V" at 65.773,60.663 h2.54
  text "W" at 71.662,60.663 h2.54
  text "V" at 91.173,60.663 h2.54
  text "W" at 97.062,60.663 h2.54
  text "V" at 116.573,60.663 h2.54
  text "W" at 122.462,60.663 h2.54
  text "Fan2" at 26.238,55.829 h1.52
  text "Fan4" at 51.638,55.829 h1.52
  text "Fan6" at 77.038,55.829 h1.52
  text "Fan8" at 102.438,55.829 h1.52
  text "Status" at 143.408,55.804 h1.52
Bottom Overlay:
  text "Button" at 29.794,71.679 h1.52
Mechanical 1:
  circle w0.013: c23.701,56.594 r1.5
  circle w0.013: c162.227,75.867 r1.5
  circle w0.013: c162.227,56.594 r1.5
  circle w0.013: c23.701,75.867 r1.5
  lines w0.013: 20.701,56.594 ccw(c23.701,56.594) 23.701,53.594 162.227,53.594 ccw(c162.227,56.594) 165.227,56.594 165.227,75.867 ccw(c162.227,75.867) 162.227,78.867 23.701,78.867 ccw(c23.701,75.867) 20.701,75.867 20.701,56.594